# Altium PCB ScoreLED.PcbDoc (part 3 of 4)
Units mil, origin at the board's own origin, x right, y up, seen from the top; angles counter-clockwise.
Board outline 15000 x 7000 mil, 4 copper layers (Top Layer, Ground, Power, Bottom Layer); 605 components, 525 nets, 1780 pads, 554 vias.
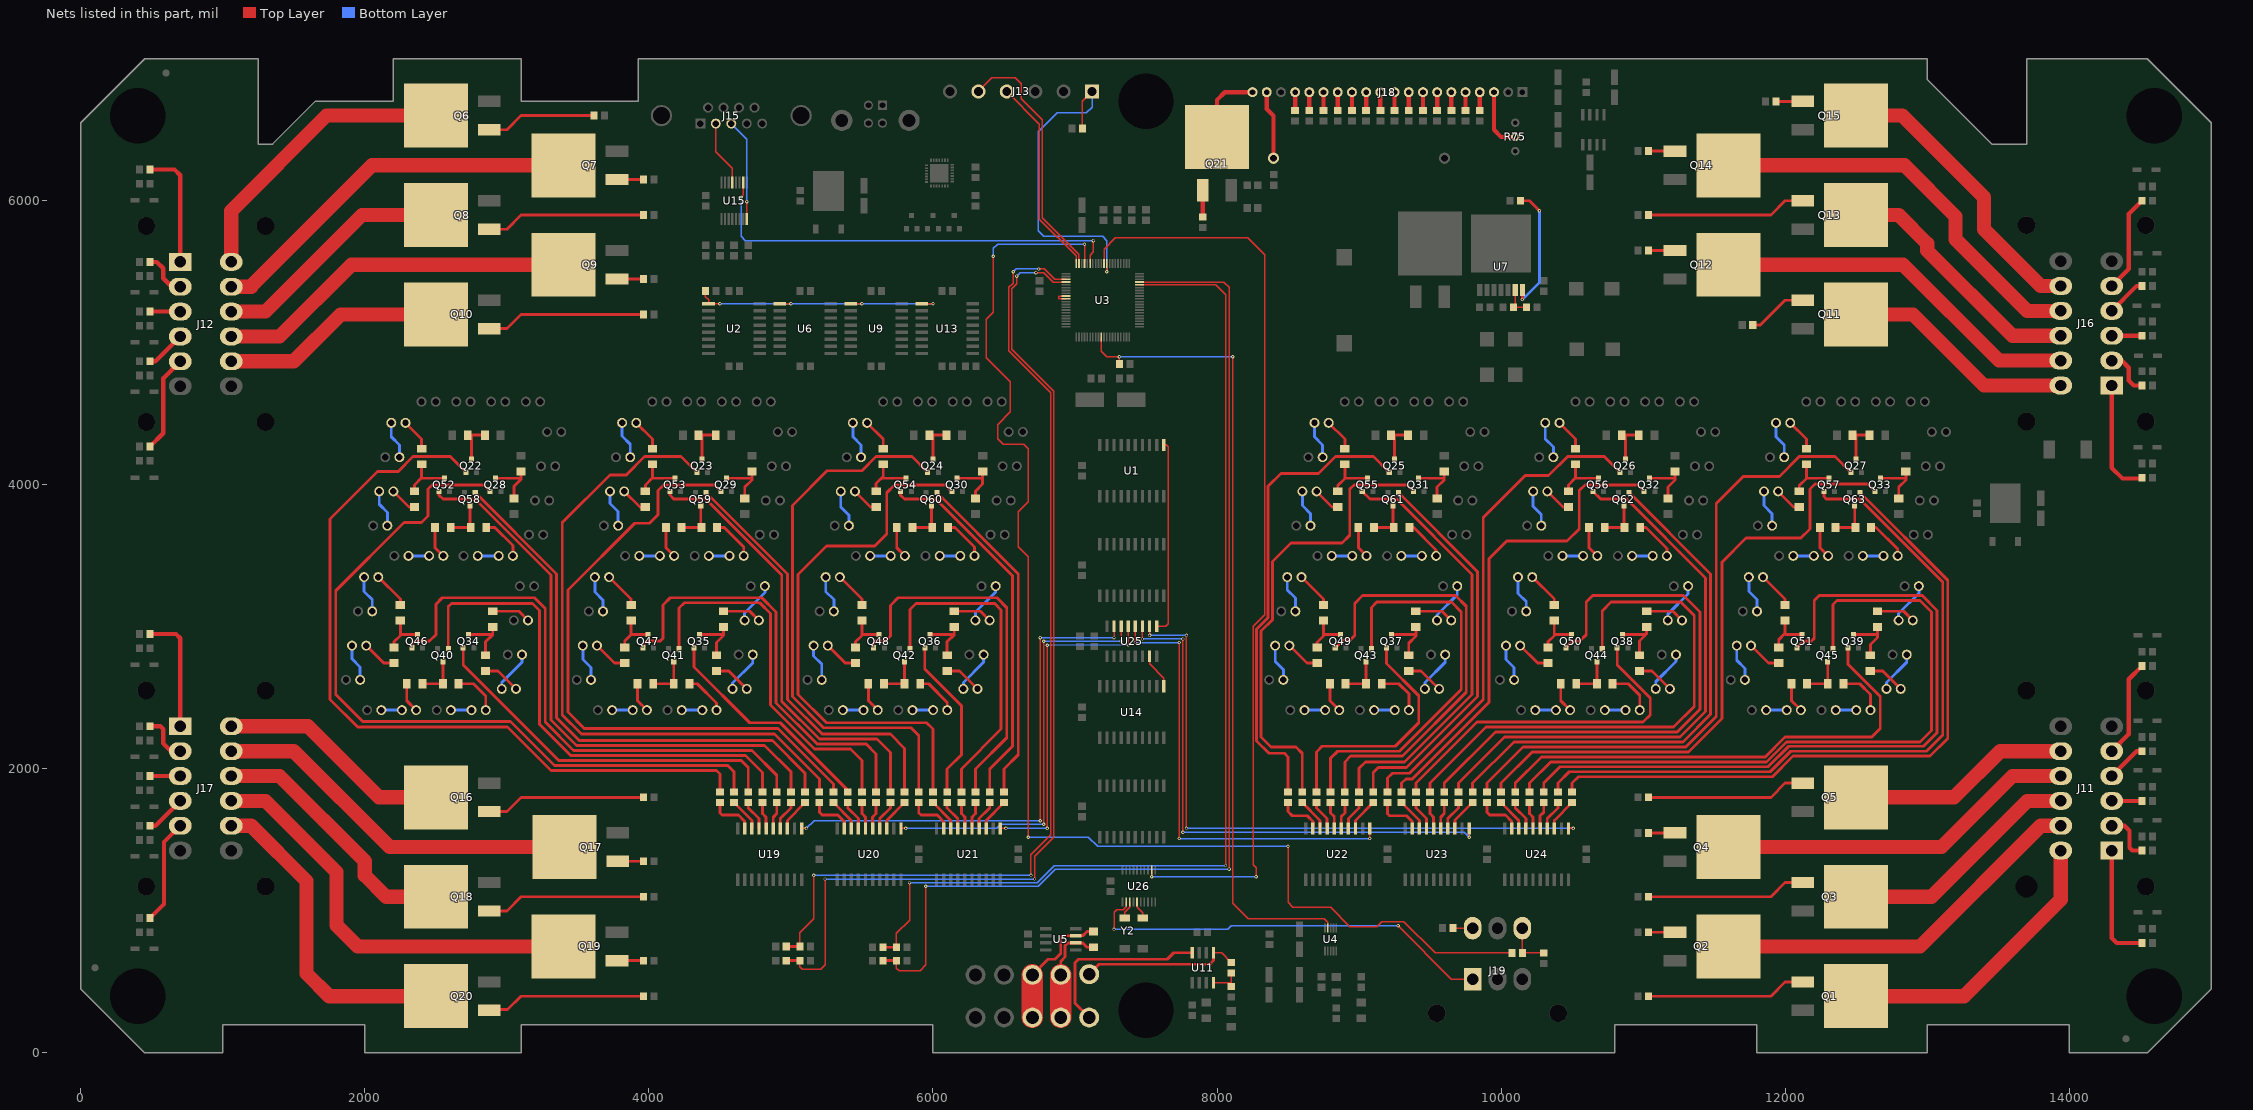
[diagram p5: the nets of this part, all layers, seen from the top]

## Via types
v1: diameter 24, hole 12, Top Layer to Bottom Layer, 468 vias
v2: diameter 50, hole 28, Top Layer to Bottom Layer, 86 vias

## Nets (pads, with @x,y where several pads share a name; then routed paths per layer and width w, separated by ;. In a path a pad name is that pad's centre, name@x,y a point inside that pad or via, vN(x,y) a via of type N, cw(c..) or ccw(c..) an arc to the next point about the centre after c; other vN are vias at no path point) (continued)
NetDS50_2: DS50.2 R147.2 | length 275.6
  Top Layer w20: R147.2@2900,3110 3084.9,3110 DS50.2@3149,3045.9
NetDS51_2: DS51.2 DS52.1 | length 300.3
  Bottom Layer w20: DS52.1@4674,3045.9 4674,3099 4816.6,3241.6 DS51.2@4816.6,3287.1
NetDS52_2: DS52.2 R148.2 | length 275.6
  Top Layer w20: R148.2@4525,3110 4709.9,3110 DS52.2@4774,3045.9
NetDS53_2: DS53.2 DS54.1 | length 300.3
  Bottom Layer w20: DS54.1@6299,3045.9 6299,3104 6441.6,3246.6 DS53.2@6441.6,3287.1
NetDS54_2: DS54.2 R149.2 | length 275.6
  Top Layer w20: R149.2@6150,3110 6334.9,3110 DS54.2@6399,3045.9
NetDS55_2: DS55.2 DS56.1 | length 300.3
  Bottom Layer w20: DS56.1@9549,3045.9 9549,3084 9691.6,3226.6 DS55.2@9691.6,3287.1
NetDS56_2: DS56.2 R150.2 | length 275.6
  Top Layer w20: R150.2@9400,3110 9584.9,3110 DS56.2@9649,3045.9
NetDS57_2: DS57.2 DS58.1 | length 300.3
  Bottom Layer w20: DS58.1@11174,3045.9 11174,3089 11316.6,3231.6 DS57.2@11316.6,3287.1
NetDS58_2: DS58.2 R151.2 | length 275.6
  Top Layer w20: R151.2@11025,3110 11209.9,3110 DS58.2@11274,3045.9
NetDS59_2: DS59.2 DS60.1 | length 300.3
  Bottom Layer w20: DS60.1@12799,3045.9 12799,3094 12941.6,3236.6 DS59.2@12941.6,3287.1
NetDS60_2: DS60.2 R152.2 | length 275.6
  Top Layer w20: R152.2@12650,3110 12834.9,3110 DS60.2@12899,3045.9
NetDS61_2: DS61.2 DS62.1 | length 300.4
  Bottom Layer w20: DS62.1@2963.9,2563.3 2963.9,2608.9 3106.5,2751.5 DS61.2@3106.5,2804.6
NetDS62_2: DS62.2 R153.2 | length 266.4
  Top Layer w20: R153.2@2850,2690 2937.2,2690 DS62.2@3063.9,2563.3
NetDS63_2: DS63.2 DS64.1 | length 300.4
  Bottom Layer w20: DS64.1@4588.9,2563.3 4588.9,2603.9 4731.5,2746.5 DS63.2@4731.5,2804.6
NetDS64_2: DS64.2 R154.2 | length 266.4
  Top Layer w20: R154.2@4475,2690 4562.2,2690 DS64.2@4688.9,2563.3
NetDS65_2: DS65.2 DS66.1 | length 300.4
  Bottom Layer w20: DS66.1@6213.9,2563.3 6213.9,2608.9 6356.5,2751.5 DS65.2@6356.5,2804.6
NetDS66_2: DS66.2 R155.2 | length 266.4
  Top Layer w20: R155.2@6100,2690 6187.2,2690 DS66.2@6313.9,2563.3
NetDS67_2: DS67.2 DS68.1 | length 300.4
  Bottom Layer w20: DS68.1@9463.9,2563.3 9463.9,2608.9 9606.5,2751.5 DS67.2@9606.5,2804.6
NetDS68_2: DS68.2 R156.2 | length 266.4
  Top Layer w20: R156.2@9350,2690 9437.2,2690 DS68.2@9563.9,2563.3
NetDS69_2: DS69.2 DS70.1 | length 300.4
  Bottom Layer w20: DS70.1@11088.9,2563.3 11088.9,2613.9 11231.5,2756.5 DS69.2@11231.5,2804.6
NetDS70_2: DS70.2 R157.2 | length 266.4
  Top Layer w20: R157.2@10975,2690 11062.2,2690 DS70.2@11188.9,2563.3
NetDS71_2: DS71.2 DS72.1 | length 300.4
  Bottom Layer w20: DS72.1@12713.9,2563.3 12713.9,2608.9 12856.5,2751.5 DS71.2@12856.5,2804.6
NetDS72_2: DS72.2 R158.2 | length 266.4
  Top Layer w20: R158.2@12600,2690 12687.2,2690 DS72.2@12813.9,2563.3
NetDS73_2: DS73.2 DS74.1 | length 145
  Bottom Layer w20: DS73.2@2606.1,2414.2 DS74.1@2751.1,2414.2
NetDS74_2: DS74.2 R165.2 | length 326.5
  Top Layer w20: R165.2@2660,2600 2765,2600 2851.1,2513.9 DS74.2@2851.1,2414.2
NetDS75_2: DS75.2 DS76.1 | length 145
  Bottom Layer w20: DS75.2@4231.1,2414.2 DS76.1@4376.1,2414.2
NetDS76_2: DS76.2 R166.2 | length 297.2
  Top Layer w20: R166.2@4285,2600 4340,2600 4476.1,2463.9 DS76.2@4476.1,2414.2
NetDS77_2: DS77.2 DS78.1 | length 145
  Bottom Layer w20: DS77.2@5856.1,2414.2 DS78.1@6001.1,2414.2
NetDS78_2: DS78.2 R167.2 | length 300.1
  Top Layer w20: R167.2@5910,2600 5970,2600 6101.1,2468.9 DS78.2@6101.1,2414.2
NetDS79_2: DS79.2 DS80.1 | length 145
  Bottom Layer w20: DS79.2@9106.1,2414.2 DS80.1@9251.1,2414.2
NetDS80_2: DS80.2 R168.2 | length 335.3
  Top Layer w20: R168.2@9160,2600 9280,2600 9351.1,2528.9 DS80.2@9351.1,2414.2
NetDS81_2: DS81.2 DS82.1 | length 145
  Bottom Layer w20: DS81.2@10731.1,2414.2 DS82.1@10876.1,2414.2
NetDS82_2: DS82.2 R169.2 | length 329.4
  Top Layer w20: R169.2@10785,2600 10895,2600 10976.1,2518.9 DS82.2@10976.1,2414.2
NetDS83_2: DS83.2 DS84.1 | length 145
  Bottom Layer w20: DS83.2@12356.1,2414.2 DS84.1@12501.1,2414.2
NetDS84_2: DS84.2 R170.2 | length 332.3
  Top Layer w20: R170.2@12410,2600 12525,2600 12601.1,2523.9 DS84.2@12601.1,2414.2
NetDS85_2: DS85.2 DS86.1 | length 145
  Bottom Layer w20: DS85.2@2116.1,2414.2 DS86.1@2261.1,2414.2
NetDS86_2: DS86.2 R171.2 | length 213.2
  Top Layer w20: R171.2@2295,2600 2295,2480.3 DS86.2@2361.1,2414.2
NetDS87_2: DS87.2 DS88.1 | length 145
  Bottom Layer w20: DS87.2@3741.1,2414.2 DS88.1@3886.1,2414.2
NetDS88_2: DS88.2 R172.2 | length 213.2
  Top Layer w20: R172.2@3920,2600 3920,2480.3 DS88.2@3986.1,2414.2
NetDS89_2: DS89.2 DS90.1 | length 145
  Bottom Layer w20: DS89.2@5366.1,2414.2 DS90.1@5511.1,2414.2
NetDS90_2: DS90.2 R173.2 | length 213.2
  Top Layer w20: R173.2@5545,2600 5545,2480.3 DS90.2@5611.1,2414.2
NetDS91_2: DS91.2 DS92.1 | length 145
  Bottom Layer w20: DS91.2@8616.1,2414.2 DS92.1@8761.1,2414.2
NetDS92_2: DS92.2 R174.2 | length 213.2
  Top Layer w20: R174.2@8795,2600 8795,2480.3 DS92.2@8861.1,2414.2
NetDS93_2: DS93.2 DS94.1 | length 145
  Bottom Layer w20: DS93.2@10241.1,2414.2 DS94.1@10386.1,2414.2
NetDS94_2: DS94.2 R175.2 | length 213.2
  Top Layer w20: R175.2@10420,2600 10420,2480.3 DS94.2@10486.1,2414.2
NetDS95_2: DS95.2 DS96.1 | length 145
  Bottom Layer w20: DS95.2@11866.1,2414.2 DS96.1@12011.1,2414.2
NetDS96_2: DS96.2 R176.2 | length 213.2
  Top Layer w20: R176.2@12045,2600 12045,2480.3 DS96.2@12111.1,2414.2
NetDS97_2: DS97.2 DS98.1 | length 265.1
  Bottom Layer w20: DS98.1@1909.5,2868.4 1909.5,2775.5 1967,2718 DS97.2@1967,2627.1
NetDS98_2: DS98.2 R183.2 | length 246.6
  Top Layer w20: DS98.2@2009.5,2868.4 2132.9,2745 R183.2@2205,2745
NetDS99_2: DS99.2 DS100.1 | length 266.5
  Bottom Layer w20: DS100.1@3535,2870 3535,2770 3592,2713 DS99.2@3592,2627.1
NetDS100_2: DS100.2 R184.2 | length 246.6
  Top Layer w20: DS100.2@3634.5,2868.4 3757.9,2745 R184.2@3830,2745
NetDS101_2: DS101.2 DS102.1 | length 265.1
  Bottom Layer w20: DS102.1@5159.5,2868.4 5159.5,2795.5 5217,2738 DS101.2@5217,2627.1
NetDS102_2: DS102.2 R185.2 | length 246.6
  Top Layer w20: DS102.2@5259.5,2868.4 5382.9,2745 R185.2@5455,2745
NetDS103_2: DS103.2 DS104.1 | length 265.1
  Bottom Layer w20: DS104.1@8409.5,2868.4 8409.5,2755.5 8467,2698 DS103.2@8467,2627.1
NetDS104_2: DS104.2 R186.2 | length 246.6
  Top Layer w20: DS104.2@8509.5,2868.4 8632.9,2745 R186.2@8705,2745
NetDS105_2: DS105.2 DS106.1 | length 265.1
  Bottom Layer w20: DS106.1@10034.5,2868.4 10034.5,2770.5 10092,2713 DS105.2@10092,2627.1
NetDS106_2: DS106.2 R187.2 | length 246.6
  Top Layer w20: DS106.2@10134.5,2868.4 10257.9,2745 R187.2@10330,2745
NetDS107_2: DS107.2 DS108.1 | length 265.1
  Bottom Layer w20: DS108.1@11659.5,2868.4 11659.5,2765.5 11717,2708 DS107.2@11717,2627.1
NetDS108_2: DS108.2 R188.2 | length 246.6
  Top Layer w20: DS108.2@11759.5,2868.4 11882.9,2745 R188.2@11955,2745
NetDS109_2: DS109.2 DS110.1 | length 265
  Bottom Layer w20: DS110.1@1994.6,3350.9 1994.6,3250.4 2052.1,3192.9 DS109.2@2052.1,3109.7
NetDS110_2: DS110.2 R189.2 | length 260.3
  Top Layer w20: DS110.2@2094.6,3350.9 2250,3195.5 R189.2@2250,3155
NetDS111_2: DS111.2 DS112.1 | length 265
  Bottom Layer w20: DS112.1@3619.6,3350.9 3619.6,3245.4 3677.1,3187.9 DS111.2@3677.1,3109.7
NetDS112_2: DS112.2 R190.2 | length 260.3
  Top Layer w20: DS112.2@3719.6,3350.9 3875,3195.5 R190.2@3875,3155
NetDS113_2: DS113.2 DS114.1 | length 265
  Bottom Layer w20: DS114.1@5244.6,3350.9 5244.6,3250.4 5302.1,3192.9 DS113.2@5302.1,3109.7
NetDS114_2: DS114.2 R191.2 | length 260.3
  Top Layer w20: DS114.2@5344.6,3350.9 5500,3195.5 R191.2@5500,3155
NetDS115_2: DS115.2 DS116.1 | length 265
  Bottom Layer w20: DS116.1@8494.6,3350.9 8494.6,3260.4 8552.1,3202.9 DS115.2@8552.1,3109.7
NetDS116_2: DS116.2 R192.2 | length 260.3
  Top Layer w20: DS116.2@8594.6,3350.9 8750,3195.5 R192.2@8750,3155
NetDS117_2: DS117.2 DS118.1 | length 265
  Bottom Layer w20: DS118.1@10119.6,3350.9 10119.6,3235.4 10177.1,3177.9 DS117.2@10177.1,3109.7
NetDS118_2: DS118.2 R193.2 | length 260.3
  Top Layer w20: DS118.2@10219.6,3350.9 10375,3195.5 R193.2@10375,3155
NetDS119_2: DS119.2 DS120.1 | length 265
  Bottom Layer w20: DS120.1@11744.6,3350.9 11744.6,3250.4 11802.1,3192.9 DS119.2@11802.1,3109.7
NetDS120_2: DS120.2 R194.2 | length 260.3
  Top Layer w20: DS120.2@11844.6,3350.9 12000,3195.5 R194.2@12000,3155
NetDS121_2: DS121.2 DS122.1 | length 265
  Bottom Layer w20: DS122.1@2101,3954.1 2101,3864 2158.4,3806.6 DS121.2@2158.4,3712.9
NetDS122_2: DS122.2 R201.2 | length 194.2
  Top Layer w20: DS122.2@2201,3954.1 2310.1,3845 R201.2@2350,3845
NetDS123_2: DS123.2 DS124.1 | length 265
  Bottom Layer w20: DS124.1@3726,3954.1 3726,3869 3783.4,3811.6 DS123.2@3783.4,3712.9
NetDS124_2: DS124.2 R202.2 | length 201.3
  Top Layer w20: DS124.2@3826,3954.1 3940.1,3840 R202.2@3980,3840
NetDS125_2: DS125.2 DS126.1 | length 265
  Bottom Layer w20: DS126.1@5351,3954.1 5351,3844 5408.4,3786.6 DS125.2@5408.4,3712.9
NetDS126_2: DS126.2 R203.2 | length 194.2
  Top Layer w20: DS126.2@5451,3954.1 5560.1,3845 R203.2@5600,3845
NetDS127_2: DS127.2 DS128.1 | length 265
  Bottom Layer w20: DS128.1@8601,3954.1 8601,3854 8658.4,3796.6 DS127.2@8658.4,3712.9
NetDS128_2: DS128.2 R204.2 | length 194.2
  Top Layer w20: DS128.2@8701,3954.1 8810.1,3845 R204.2@8850,3845
NetDS129_2: DS129.2 DS130.1 | length 265
  Bottom Layer w20: DS130.1@10226,3954.1 10226,3849 10283.4,3791.6 DS129.2@10283.4,3712.9
NetDS130_2: DS130.2 R205.2 | length 194.2
  Top Layer w20: DS130.2@10326,3954.1 10435.1,3845 R205.2@10475,3845
NetDS131_2: DS131.2 DS132.1 | length 265
  Bottom Layer w20: DS132.1@11851,3954.1 11851,3854 11908.4,3796.6 DS131.2@11908.4,3712.9
NetDS132_2: DS132.2 R206.2 | length 194.2
  Top Layer w20: DS132.2@11951,3954.1 12060.1,3845 R206.2@12100,3845
NetDS133_2: DS133.2 DS134.1 | length 265.5
  Bottom Layer w20: DS134.1@2186.1,4436.7 2186.1,4338.9 2243.5,4281.5 DS133.2@2243.5,4195
NetDS134_2: DS134.2 R207.2 | length 228.9
  Top Layer w20: DS134.2@2286.1,4436.7 2400,4322.8 R207.2@2400,4255
NetDS135_2: DS135.2 DS136.1 | length 265.5
  Bottom Layer w20: DS136.1@3811.1,4436.7 3811.1,4343.9 3868.5,4286.5 DS135.2@3868.5,4195
NetDS136_2: DS136.2 R208.2 | length 228.9
  Top Layer w20: DS136.2@3911.1,4436.7 4025,4322.8 R208.2@4025,4255
NetDS137_2: DS137.2 DS138.1 | length 265.5
  Bottom Layer w20: DS138.1@5436.1,4436.7 5436.1,4338.9 5493.5,4281.5 DS137.2@5493.5,4195
NetDS138_2: DS138.2 R209.2 | length 228.9
  Top Layer w20: DS138.2@5536.1,4436.7 5650,4322.8 R209.2@5650,4255
NetDS139_2: DS139.2 DS140.1 | length 265.5
  Bottom Layer w20: DS140.1@8686.1,4436.7 8686.1,4338.9 8743.5,4281.5 DS139.2@8743.5,4195
NetDS140_2: DS140.2 R210.2 | length 228.9
  Top Layer w20: DS140.2@8786.1,4436.7 8900,4322.8 R210.2@8900,4255
NetDS141_2: DS141.2 DS142.1 | length 265.5
  Bottom Layer w20: DS142.1@10311.1,4436.7 10311.1,4323.9 10368.5,4266.5 DS141.2@10368.5,4195
NetDS142_2: DS142.2 R211.2 | length 228.9
  Top Layer w20: DS142.2@10411.1,4436.7 10525,4322.8 R211.2@10525,4255
NetDS143_2: DS143.2 DS144.1 | length 265.5
  Bottom Layer w20: DS144.1@11936.1,4436.7 11936.1,4338.9 11993.5,4281.5 DS143.2@11993.5,4195
NetDS144_2: DS144.2 R212.2 | length 228.9
  Top Layer w20: DS144.2@12036.1,4436.7 12150,4322.8 R212.2@12150,4255
NetDS145_2: DS145.2 DS146.1 | length 145
  Bottom Layer w20: DS145.2@2307.5,3500 DS146.1@2452.5,3500
NetDS146_2: DS146.2 R219.2 | length 223.8
  Top Layer w20: R219.2@2495,3700 2495,3557.5 DS146.2@2552.5,3500
NetDS147_2: DS147.2 DS148.1 | length 145
  Bottom Layer w20: DS147.2@3932.5,3500 DS148.1@4077.5,3500
NetDS148_2: DS148.2 R220.2 | length 223.8
  Top Layer w20: R220.2@4120,3700 4120,3557.5 DS148.2@4177.5,3500
NetDS149_2: DS149.2 DS150.1 | length 145
  Bottom Layer w20: DS149.2@5557.5,3500 DS150.1@5702.5,3500
NetDS150_2: DS150.2 R221.2 | length 223.8
  Top Layer w20: R221.2@5745,3700 5745,3557.5 DS150.2@5802.5,3500
NetDS151_2: DS151.2 DS152.1 | length 145
  Bottom Layer w20: DS151.2@8807.5,3500 DS152.1@8952.5,3500
NetDS152_2: DS152.2 R222.2 | length 223.8
  Top Layer w20: R222.2@8995,3700 8995,3557.5 DS152.2@9052.5,3500
NetDS153_2: DS153.2 DS154.1 | length 145
  Bottom Layer w20: DS153.2@10432.5,3500 DS154.1@10577.5,3500
NetDS154_2: DS154.2 R223.2 | length 223.8
  Top Layer w20: R223.2@10620,3700 10620,3557.5 DS154.2@10677.5,3500
NetDS155_2: DS155.2 DS156.1 | length 145
  Bottom Layer w20: DS155.2@12057.5,3500 DS156.1@12202.5,3500
NetDS156_2: DS156.2 R224.2 | length 223.8
  Top Layer w20: R224.2@12245,3700 12245,3557.5 DS156.2@12302.5,3500
NetDS157_2: DS157.2 DS158.1 | length 147.5
  Bottom Layer w20: DS157.2@2795,3500 DS158.1@2942.5,3500
NetDS158_2: DS158.2 R225.2 | length 312.8
  Top Layer w20: R225.2@2855,3700 2915,3700 3042.5,3572.5 DS158.2@3042.5,3500
NetDS159_2: DS159.2 DS160.1 | length 145
  Bottom Layer w20: DS159.2@4422.5,3500 DS160.1@4567.5,3500
NetDS160_2: DS160.2 R226.2 | length 307
  Top Layer w20: R226.2@4480,3700 4530,3700 4667.5,3562.5 DS160.2@4667.5,3500
NetDS161_2: DS161.2 DS162.1 | length 145
  Bottom Layer w20: DS161.2@6047.5,3500 DS162.1@6192.5,3500
NetDS162_2: DS162.2 R227.2 | length 307
  Top Layer w20: R227.2@6105,3700 6155,3700 6292.5,3562.5 DS162.2@6292.5,3500
NetDS163_2: DS163.2 DS164.1 | length 145
  Bottom Layer w20: DS163.2@9297.5,3500 DS164.1@9442.5,3500
NetDS164_2: DS164.2 R228.2 | length 295.2
  Top Layer w20: R228.2@9355,3700 9385,3700 9542.5,3542.5 DS164.2@9542.5,3500
NetDS165_2: DS165.2 DS166.1 | length 145
  Bottom Layer w20: DS165.2@10922.5,3500 DS166.1@11067.5,3500
NetDS166_2: DS166.2 R229.2 | length 301.1
  Top Layer w20: R229.2@10980,3700 11020,3700 11167.5,3552.5 DS166.2@11167.5,3500
NetDS167_2: DS167.2 DS168.1 | length 145
  Bottom Layer w20: DS167.2@12547.5,3500 DS168.1@12692.5,3500
NetDS168_2: DS168.2 R230.2 | length 298.2
  Top Layer w20: R230.2@12605,3700 12640,3700 12792.5,3547.5 DS168.2@12792.5,3500
NetJ3_1: J3.1 J7.1 R5.2 U5.7 | length 917.8
  Top Layer w20: J7.1@6700,550 6810,660 6860,660 6900,700 6900,805 6920,825 7055,825 7085,855 R5.2@7130,855
  Top Layer w150: J3.1@6700,250 J7.1@6700,550
NetJ4_1: J4.1 J8.1 R5.1 U5.6 | length 738.1
  Top Layer w20: J8.1@6900,550 6900,645 6930,675 6930,755 6950,775 7055,775 7085,745 R5.1@7130,745
  Top Layer w150: J4.1@6900,250 J8.1@6900,550
NetJ9_1: J9.1 R59.2 U11.5 | length 1123
  Top Layer w10: U11.5@7975,705.32 8031.68,705.32 R59.2@8100,637
  Top Layer w20: J9.1@7100,555 7170,625 7950,625 7975,650 U11.5@7975,705.32
NetJ10_1: J10.1 U11.8 | length 1280.5
  Top Layer w20: J10.1@7100,250 7000,350 7000,635 7025,660 7650,660 7695.32,705.32 U11.8@7825,705.32
NetJ11_1: J11.1 R33.2 | length 842.5
  Top Layer w30: J11.1@14300,1425 14300,810 14335,775 R33.2@14513,775
NetJ11_2: J11.2 R35.2 | length 355.8
  Top Layer w30: J11.2@14300,1600 14390,1600 14425,1565 14425,1445 14445,1425 R35.2@14513,1425
NetJ11_3: J11.3 R37.2 | length 213
  Top Layer w30: J11.3@14300,1775 R37.2@14513,1775
NetJ11_4: J11.4 R39.2 | length 285.5
  Top Layer w30: J11.4@14300,1950 14475,2125 R39.2@14513,2125
NetJ11_5: J11.5 R41.2 | length 688.2
  Top Layer w30: J11.5@14300,2125 14420,2245 14420,2632 R41.2@14513,2725
NetJ11_8: J11.8 Q5.2 | length 1575.6
  Top Layer w100: Q5.2@12500,1800 13190,1800 13515,2125 J11.8@13941,2125
NetJ11_9: J11.9 Q4.2 | length 2548.1
  Top Layer w100: Q4.2@11600,1450 13100,1450 13600,1950 J11.9@13941,1950
NetJ11_10: J11.10 Q3.2 | length 1720.6
  Top Layer w100: Q3.2@12500,1100 13030,1100 13705,1775 J11.10@13941,1775
NetJ11_11: J11.11 Q2.2 | length 2693.1
  Top Layer w100: Q2.2@11600,750 12950,750 13800,1600 J11.11@13941,1600
NetJ11_12: J11.12 Q1.2 | length 2067.1
  Top Layer w100: Q1.2@12500,400 13260,400 13941,1081 J11.12@13941,1425
NetJ12_1: J12.1 R43.2 | length 839.6
  Top Layer w30: R43.2@487,6220 660,6220 700,6180 J12.1@700,5570
NetJ12_2: J12.2 R45.2 | length 326.5
  Top Layer w30: R45.2@487,5570 535,5570 580,5525 580,5455 640,5395 J12.2@700,5395
NetJ12_3: J12.3 R47.2 | length 213
  Top Layer w30: R47.2@487,5220 J12.3@700,5220
NetJ12_4: J12.4 R49.2 | length 285.5
  Top Layer w30: R49.2@487,4870 525,4870 J12.4@700,5045
NetJ12_5: J12.5 R51.2 | length 688.2
  Top Layer w30: R51.2@487,4270 580,4363 580,4750 J12.5@700,4870
NetJ12_8: J12.8 Q10.2 | length 1577.7
  Top Layer w100: J12.8@1059,4870 1500,4870 1830,5200 Q10.2@2500,5200
NetJ12_9: J12.9 Q9.2 | length 2550.2
  Top Layer w100: J12.9@1059,5045 1400,5045 1905,5550 Q9.2@3400,5550
NetJ12_10: J12.10 Q8.2 | length 1731.7
  Top Layer w100: J12.10@1050,5220 1300,5220 1980,5900 Q8.2@2500,5900
NetJ12_11: J12.11 Q7.2 | length 2683.1
  Top Layer w100: J12.11@1059,5395 1200,5395 ; 1200,5400 2050,6250 ; 2060,6250 Q7.2@3400,6250
NetJ12_12: J12.12 Q6.2 | length 2077.9
  Top Layer w100: J12.12@1059,5570 1059,5929 1730,6600 Q6.2@2500,6600
NetJ13_1: J13.1 R3.1 U3.9 | length 2338.1
  Top Layer w10: R3.1@7052,6510 7052,6702 J13.1@7120,6770 ; v1(7224.53,5500.47) U3.9@7224.53,5559.84
  Bottom Layer w10: J13.1@7120,6770 7120,6660 7080,6620 6875,6620 6740,6485 6740,5790 6780,5750 7194.53,5750 7224.53,5720 v1(7224.53,5500.47)
NetJ15_2: J15.2 U15.13 | length 463.2
  Top Layer w10: J15.2@4471,6544 4471,6344 4587.2,6227.8 U15.13@4587.2,6128.94
NetJ15_3: J15.3 U15.8 | length 718.3
  Top Layer w10: U15.8@4689.57,5871.06 v1(4689.57,5994.57)
  Bottom Layer w10: J15.3@4580,6544 4689.57,6434.43 v1(4689.57,5994.57)
NetJ16_1: J16.1 R84.2 | length 826.1
  Top Layer w30: J16.1@14300,4700 14300,4120 14375,4045 14508,4045 R84.2@14513,4050
NetJ16_2: J16.2 R86.2 | length 338.2
  Top Layer w30: J16.2@14300,4875 14370,4875 14420,4825 14420,4735 14455,4700 R86.2@14513,4700
NetJ16_3: J16.3 R88.2 | length 213
  Top Layer w30: J16.3@14300,5050 R88.2@14513,5050
NetJ16_4: J16.4 R90.2 | length 285.5
  Top Layer w30: J16.4@14300,5225 14475,5400 R90.2@14513,5400
NetJ16_5: J16.5 R92.2 | length 688.2
  Top Layer w30: J16.5@14300,5400 14420,5520 14420,5907 R92.2@14513,6000
NetJ16_8: J16.8 Q15.2 | length 2069.9
  Top Layer w100: Q15.2@12500,6600 12825,6600 13400,6025 13400,5800 13800,5400 J16.8@13941,5400
NetJ16_9: J16.9 Q14.2 | length 2849.3
  Top Layer w100: Q14.2@11610,6250 12840,6250 13200,5890 13200,5730 13705,5225 J16.9@13941,5225
NetJ16_10: J16.10 Q13.2 | length 1822.4
  Top Layer w100: Q13.2@12500,5900 12800,5900 13000,5700 13000,5650 13600,5050 J16.10@13941,5050
NetJ16_11: J16.11 Q12.2 | length 2620.6
  Top Layer w100: Q12.2@11600,5550 12830,5550 13505,4875 J16.11@13941,4875
NetJ16_12: J16.12 Q11.2 | length 1648.1
  Top Layer w100: Q11.2@12500,5200 12900,5200 13400,4700 J16.12@13941,4700
NetJ17_1: J17.1 R94.2 | length 845.4
  Top Layer w30: R94.2@487,2950 670,2950 700,2920 J17.1@700,2300
NetJ17_2: J17.2 R96.2 | length 344.1
  Top Layer w30: R96.2@487,2300 560,2300 580,2280 580,2180 635,2125 J17.2@700,2125
NetJ17_3: J17.3 R98.2 | length 213
  Top Layer w30: R98.2@487,1950 J17.3@700,1950
NetJ17_4: J17.4 R100.2 | length 285.5
  Top Layer w30: R100.2@487,1600 525,1600 J17.4@700,1775
NetJ17_5: J17.5 R102.2 | length 738.2
  Top Layer w30: R102.2@487,950 585,1048 585,1485 J17.5@700,1600
NetJ17_8: J17.8 Q20.2 | length 2318.8
  Top Layer w100: J17.8@1059,1600 1200,1600 1590,1210 1590,560 1750,400 Q20.2@2500,400
NetJ17_9: J17.9 Q19.2 | length 2985.2
  Top Layer w100: J17.9@1059,1775 1300,1775 1800,1275 1800,900 1950,750 Q19.2@3400,750
NetJ17_10: J17.10 Q18.2 | length 1651.7
  Top Layer w100: J17.10@1059,1950 1400,1950 2000,1350 2000,1250 2150,1100 Q18.2@2300,1100
NetJ17_11: J17.11 Q17.2 | length 2620.6
  Top Layer w100: J17.11@1059,2125 1500,2125 2175,1450 ; 2180,1450 Q17.2@3405,1450
NetJ17_12: J17.12 Q16.2 | length 1448.1
  Top Layer w100: J17.12@1059,2300 1600,2300 2100,1800 Q16.2@2300,1800
NetJ18_3: J18.3 R75.2 | length 435.7
  Top Layer w30: J18.3@9950,6765 9950,6500 10000,6450 R75.2@10100,6450
NetJ18_4: J18.4 R76.2 | length 128
  Top Layer w30: R76.2@9850,6637 J18.4@9850,6765
NetJ18_5: J18.5 R77.2 | length 128
  Top Layer w30: R77.2@9750,6637 J18.5@9750,6765
NetJ18_6: J18.6 R78.2 | length 128
  Top Layer w30: R78.2@9650,6637 J18.6@9650,6765
NetJ18_7: J18.7 R20.2 | length 128
  Top Layer w30: R20.2@9550,6637 J18.7@9550,6765
NetJ18_8: J18.8 R21.2 | length 128
  Top Layer w30: R21.2@9450,6637 J18.8@9450,6765
NetJ18_9: J18.9 R22.2 | length 128
  Top Layer w30: R22.2@9350,6637 J18.9@9350,6765
NetJ18_10: J18.10 R23.2 | length 128
  Top Layer w30: R23.2@9250,6637 J18.10@9250,6765
NetJ18_11: J18.11 R24.2 | length 128
  Top Layer w30: R24.2@9150,6637 J18.11@9150,6765
NetJ18_12: J18.12 R25.2 | length 128
  Top Layer w30: R25.2@9050,6637 J18.12@9050,6765
NetJ18_13: J18.13 R26.2 | length 128
  Top Layer w30: R26.2@8950,6637 J18.13@8950,6765
NetJ18_14: J18.14 R27.2 | length 128
  Top Layer w30: R27.2@8850,6637 J18.14@8850,6765
NetJ18_15: J18.15 R79.2 | length 128
  Top Layer w30: R79.2@8750,6637 J18.15@8750,6765
NetJ18_16: J18.16 R80.2 | length 128
  Top Layer w30: R80.2@8650,6637 J18.16@8650,6765
NetJ18_17: J18.17 R81.2 | length 128
  Top Layer w30: R81.2@8550,6637 J18.17@8550,6765
NetJ18_19: J18.19 R67.2 | length 484.7
  Top Layer w30: J18.19@8350,6765 8350,6646.85 8397.64,6599.21 R67.2@8397.64,6300
NetJ18_20: J18.20 Q21.2 | length 532.8
  Top Layer w30: Q21.2@8000,6450 8000,6710 8055,6765 J18.20@8250,6765
NetJ19_1: J19.1 U26.2 | length 2945.2
  Top Layer w10: v1(7275,870) 7275,990 7295,1010 7340,1010 7360.43,1030.43 U26.2@7360.43,1062.8 ; v1(9275,895) 9650,520 J19.1@9800,520
  Bottom Layer w10: v1(7275,870) 8075,870 8100,895 v1(9275,895)
NetJ19_4: J19.4 R233.2 R234.2 | length 324
  Top Layer w10: J19.4@10150,879 R233.2@10150,705 R234.2@10300,705
NetJ19_6: J19.6 R232.2 | length 138
  Top Layer w10: R232.2@9662,879 J19.6@9800,879
NetQ1_1: Q1.1 R6.2 | length 1129.4
  Top Layer w20: R6.2@11037,400 11900,400 12000,500 Q1.1@12125,500
NetQ2_1: Q2.1 R7.2 | length 188
  Top Layer w20: R7.2@11037,850 Q2.1@11225,850
NetQ3_1: Q3.1 R8.2 | length 1129.4
  Top Layer w20: R8.2@11037,1100 11900,1100 12000,1200 Q3.1@12125,1200
NetQ4_1: Q4.1 R9.2 | length 188
  Top Layer w20: R9.2@11037,1550 Q4.1@11225,1550
NetQ5_1: Q5.1 R10.2 | length 1129.4
  Top Layer w20: R10.2@11037,1800 11900,1800 12000,1900 Q5.1@12125,1900
NetQ6_1: Q6.1 R11.2 | length 779.4
  Top Layer w20: Q6.1@2875,6500 3000,6500 3100,6600 R11.2@3613,6600
NetQ7_1: Q7.1 R12.2 | length 188
  Top Layer w20: Q7.1@3775,6150 R12.2@3963,6150
NetQ8_1: Q8.1 R13.2 | length 1129.4
  Top Layer w20: Q8.1@2875,5800 3000,5800 3100,5900 R13.2@3963,5900
NetQ9_1: Q9.1 R14.2 | length 188
  Top Layer w20: Q9.1@3775,5450 R14.2@3963,5450
NetQ10_1: Q10.1 R15.2 | length 1129.4
  Top Layer w20: Q10.1@2875,5100 3000,5100 3100,5200 R15.2@3963,5200
NetQ11_1: Q11.1 R62.2 | length 422.5
  Top Layer w20: R62.2@11775,5125 11825,5125 12000,5300 Q11.1@12125,5300
NetQ12_1: Q12.1 R63.2 | length 188
  Top Layer w20: R63.2@11037,5650 Q12.1@11225,5650
NetQ13_1: Q13.1 R64.2 | length 1129.4
  Top Layer w20: R64.2@11037,5900 11900,5900 12000,6000 Q13.1@12125,6000
NetQ14_1: Q14.1 R65.2 | length 188
  Top Layer w20: R65.2@11037,6350 Q14.1@11225,6350
NetQ15_1: Q15.1 R66.2 | length 188
  Top Layer w20: R66.2@11937,6700 Q15.1@12125,6700
NetQ16_1: Q16.1 R69.2 | length 1129.4
  Top Layer w20: Q16.1@2875,1700 3000,1700 3100,1800 R69.2@3963,1800
NetQ17_1: Q17.1 R70.2 | length 183
  Top Layer w20: Q17.1@3780,1350 R70.2@3963,1350
NetQ18_1: Q18.1 R71.2 | length 1129.4
  Top Layer w20: Q18.1@2875,1000 3000,1000 3100,1100 R71.2@3963,1100
NetQ19_1: Q19.1 R72.2 | length 188
  Top Layer w20: Q19.1@3775,650 R72.2@3963,650
NetQ20_1: Q20.1 R73.2 | length 1127.4
  Top Layer w20: Q20.1@2875,305 3005,305 3100,400 R73.2@3963,400
NetQ21_1: Q21.1 R83.2 | length 188
  Top Layer w30: R83.2@7900,5887 Q21.1@7900,6075
NetQ22_1: Q22.1 R105.2 | length 5546.4
  Top Layer w20: Q22.1@2712.6,4088.74 2601.34,4200 2340,4200 2235,4095 2090,4095 1755,3760 1755,2490 1950,2295 3005,2295 3310,1990 4475,1990 4500,1965 R105.2@4500,1837
NetQ22_3: Q22.3 R111.1 R117.1 | length 283.7
  Top Layer w20: R111.1@2725,4350 R117.1@2845,4350 ; Q22.3@2750,4181.26 R111.1@2750,4345
NetQ23_1: Q23.1 R106.2 | length 4630.7
  Top Layer w20: Q23.1@4337.6,4088.74 4226.34,4200 3970,4200 3840,4070 3725,4070 3390,3735 3390,2380 3525,2245 4885,2245 5200,1930 R106.2@5200,1837
NetQ23_3: Q23.3 R112.1 R118.1 | length 288.7
  Top Layer w20: R112.1@4350,4350 R118.1@4470,4350 ; Q23.3@4375,4181.26 R112.1@4375,4350
NetQ24_1: Q24.1 R107.2 | length 3888.5
  Top Layer w20: R107.2@5900,1837 5900,2235 5845,2290 5230,2290 5010,2510 5010,3855 5255,4100 5500,4100 5600,4200 5851.34,4200 Q24.1@5962.6,4088.74
NetQ24_3: Q24.3 R113.1 R119.1 | length 288.7
  Top Layer w20: R113.1@5975,4350 R119.1@6095,4350 ; Q24.3@6000,4181.26 R113.1@6000,4350
NetQ25_1: Q25.1 R108.2 | length 3329
  Top Layer w20: R108.2@8500,1837 8500,2085 8475,2110 8365,2110 8278,2197 8278,2983 8360,3065 8360,3990 8450,4080 8715,4080 8835,4200 9101.34,4200 Q25.1@9212.6,4088.74
NetQ25_3: Q25.3 R114.1 R120.1 | length 278.7
  Top Layer w20: R114.1@9225,4350 R120.1@9345,4350 ; Q25.3@9250,4181.26 R114.1@9250,4340
NetQ26_1: Q26.1 R109.2 | length 3469.7
  Top Layer w20: R109.2@9200,1837 9200,1935 9235,1970 9355,1970 9875,2490 9875,3770 10170,4065 10335,4065 10470,4200 10726.34,4200 Q26.1@10837.6,4088.74
NetQ26_3: Q26.3 R115.1 R121.1 | length 283.7
  Top Layer w20: R115.1@10850,4350 R121.1@10970,4350 ; Q26.3@10875,4181.26 R115.1@10875,4345
NetQ27_1: Q27.1 R110.2 | length 4503.1
  Top Layer w20: R110.2@9900,1837 9900,1900 10155,2155 11300,2155 11515,2370 11515,3870 11705,4060 11960,4060 12100,4200 12351.34,4200 Q27.1@12462.6,4088.74
NetQ27_3: Q27.3 R116.1 R122.1 | length 283.7
  Top Layer w20: R116.1@12475,4350 R122.1@12595,4350 ; Q27.3@12500,4181.26 R116.1@12500,4345
NetQ28_1: Q28.1 R123.2 | length 5430.4
  Top Layer w20: Q28.1@2882.6,3953.74 2836.34,4000 2475,4000 2445,3970 2445,3780 2400,3735 2275,3735 1795,3255 1795,2525 1985,2335 3025,2335 3335,2025 4555,2025 4600,1980 R123.2@4600,1837
NetQ28_3: Q28.3 R129.1 R135.1 | length 389.5
  Top Layer w20: Q28.3@2920,4046.26 3098.74,4046.26 ; R135.1@3050,3905 3050,3990 3100,4040 R129.1@3100,4095
NetQ29_1: Q29.1 R124.2 | length 4500
  Top Layer w20: Q29.1@4507.6,3953.74 4461.34,4000 4105,4000 4065,3960 4065,3790 4005,3730 3900,3730 3430,3260 3430,2400 3545,2285 4910,2285 5300,1895 R124.2@5300,1837
NetQ29_3: Q29.3 R130.1 R136.1 | length 387
  Top Layer w20: Q29.3@4545,4046.26 4721.26,4046.26 ; R136.1@4675,3905 4675,3985 4725,4035 R130.1@4725,4095
NetQ30_1: Q30.1 R125.2 | length 3872.1
  Top Layer w20: R125.2@6000,1837 6000,2280 5955,2325 5250,2325 5050,2525 5050,3370 5250,3570 5590,3570 5675,3655 5675,3945 5730,4000 6086.34,4000 Q30.1@6132.6,3953.74
NetQ30_3: Q30.3 R131.1 R137.1 | length 387
  Top Layer w20: Q30.3@6170,4046.26 6346.26,4046.26 ; R137.1@6300,3905 6300,3955 6350,4005 R131.1@6350,4095
NetQ31_1: Q31.1 R126.2 | length 3304.6
  Top Layer w20: R126.2@8600,1837 8600,2110 8555,2155 8380,2155 8310,2225 8310,2970 8390,3050 8390,3460 8520,3590 8880,3590 8935,3645 8935,3970 8965,4000 9336.34,4000 Q31.1@9382.6,3953.74
NetQ31_3: Q31.3 R132.1 R138.1 | length 389.5
  Top Layer w20: Q31.3@9420,4046.26 9598.74,4046.26 ; R138.1@9550,3905 9550,3985 9600,4035 R132.1@9600,4095
NetQ32_1: Q32.1 R127.2 | length 3409.4
  Top Layer w20: R127.2@9300,1837 9300,1900 9330,1930 9375,1930 9915,2470 9915,3480 10040,3605 10465,3605 10550,3690 10550,3960 10590,4000 10961.34,4000 Q32.1@11007.6,3953.74
NetQ32_3: Q32.3 R133.1 R139.1 | length 389.5
  Top Layer w20: Q32.3@11045,4046.26 11223.74,4046.26 ; R139.1@11175,3905 11175,3985 11225,4035 R133.1@11225,4095
NetQ33_1: Q33.1 R128.2 | length 4397.1
  Top Layer w20: R128.2@10000,1837 10000,1900 10220,2120 11320,2120 11555,2355 11555,3455 11725,3625 12110,3625 12175,3690 12175,3970 12210,4005 12581.34,4005 Q33.1@12632.6,3953.74
NetQ33_3: Q33.3 R134.1 R140.1 | length 389.5
  Top Layer w20: Q33.3@12670,4046.26 12848.74,4046.26 ; R140.1@12800,3905 12800,3985 12850,4035 R134.1@12850,4095
NetQ34_1: Q34.1 R141.2 | length 2601
  Top Layer w20: Q34.1@2692.6,2853.74 2692.6,2732.4 3365,2060 4650,2060 4700,2010 R141.2@4700,1837
NetQ34_3: Q34.3 R147.1 R153.1 | length 382
  Top Layer w20: Q34.3@2730,2946.26 2891.26,2946.26 ; R153.1@2850,2800 2850,2895 2900,2945 R147.1@2900,3000
NetQ35_1: Q35.1 R142.2 | length 1591
  Top Layer w20: Q35.1@4317.6,2853.74 4317.6,2717.4 4710,2325 4925,2325 5400,1850 R142.2@5400,1837
NetQ35_3: Q35.3 R148.1 R154.1 | length 384.5
  Top Layer w20: Q35.3@4355,2946.26 4518.74,2946.26 ; R154.1@4475,2800 4475,2890 4525,2940 R148.1@4525,3000
NetQ36_1: Q36.1 R143.2 | length 1164.8
  Top Layer w20: Q36.1@5942.6,2853.74 5942.6,2702.4 6200,2445 6200,2100 6100,2000 R143.2@6100,1837
NetQ36_3: Q36.3 R149.1 R155.1 | length 379.5
  Top Layer w20: Q36.3@5980,2946.26 6148.74,2946.26 ; R155.1@6100,2805 6100,2895 6150,2945 R149.1@6150,2995
NetQ37_1: Q37.1 R144.2 | length 1710.8
  Top Layer w20: R144.2@8700,1837 8700,2120 8740,2160 9255,2160 9420,2325 9420,2515 9192.6,2742.4 Q37.1@9192.6,2853.74
NetQ37_3: Q37.3 R150.1 R156.1 | length 387
  Top Layer w20: Q37.3@9230,2946.26 9396.26,2946.26 ; R156.1@9350,2800 9350,2885 9400,2935 R150.1@9400,3000
NetQ38_1: Q38.1 R145.2 | length 2481.8
  Top Layer w20: R145.2@9400,1837 9400,1900 9830,2330 11000,2330 11050,2380 11050,2500 10817.6,2732.4 Q38.1@10817.6,2853.74
NetQ38_3: Q38.3 R151.1 R157.1 | length 387
  Top Layer w20: Q38.3@10855,2946.26 11021.26,2946.26 ; R157.1@10975,2800 10975,2900 11025,2950 R151.1@11025,3000
NetQ39_1: Q39.1 R146.2 | length 3455.4
  Top Layer w20: R146.2@10100,1837 10100,1900 10285,2085 11860,2085 12000,2225 12610,2225 12670,2285 12670,2510 12442.6,2737.4 Q39.1@12442.6,2853.74
NetQ39_3: Q39.3 R152.1 R158.1 | length 387
  Top Layer w20: Q39.3@12480,2946.26 12646.26,2946.26 ; R158.1@12600,2800 12600,2875 12650,2925 R152.1@12650,3000
NetQ40_1: Q40.1 R159.2 | length 3617.8
  Top Layer w20: Q40.1@2587.4,2846.26 2587.4,3142.6 2609.8,3165 3180,3165 3230,3115 3230,2315 3450,2095 4680,2095 4800,1975 R159.2@4800,1837
NetQ40_3: Q40.3 R165.1 R171.1 | length 298.7
  Top Layer w20: R171.1@2405,2600 R165.1@2550,2600 Q40.3@2550,2753.74
NetQ41_1: Q41.1 R160.2 | length 2650
  Top Layer w20: Q41.1@4212.4,2846.26 4212.4,3132.6 4249.8,3170 4780,3170 4855,3095 4855,2450 5165,2140 5420,2140 5500,2060 R160.2@5500,1837
NetQ41_3: Q41.3 R166.1 R172.1 | length 298.7
  Top Layer w20: R172.1@4030,2600 R166.1@4175,2600 Q41.3@4175,2753.74
NetQ42_1: Q42.1 R161.2 | length 2354
  Top Layer w20: Q42.1@5837.4,2846.26 5837.4,3122.4 5880,3165 6435,3165 6480,3120 6480,2280 6200,2000 R161.2@6200,1837
NetQ42_3: Q42.3 R167.1 R173.1 | length 298.7
  Top Layer w20: R173.1@5655,2600 R167.1@5800,2600 Q42.3@5800,2753.74
NetQ43_1: Q43.1 R162.2 | length 2872.2
  Top Layer w20: R162.2@8800,1837 8800,2075 8850,2125 9285,2125 9720,2560 9720,3105 9650,3175 9125,3175 9087.4,3137.4 Q43.1@9087.4,2846.26
NetQ43_3: Q43.3 R168.1 R174.1 | length 298.7
  Top Layer w20: R174.1@8905,2600 R168.1@9050,2600 Q43.3@9050,2753.74
NetQ44_1: Q44.1 R163.2 | length 3765.7
  Top Layer w20: R163.2@9500,1837 9500,1900 9895,2295 11215,2295 11360,2440 11360,3080 11265,3175 10775,3175 10712.4,3112.4 Q44.1@10712.4,2846.26
NetQ44_3: Q44.3 R169.1 R175.1 | length 298.7
  Top Layer w20: R175.1@10530,2600 R169.1@10675,2600 Q44.3@10675,2753.74
NetQ45_1: Q45.1 R164.2 | length 4929.7
  Top Layer w20: R164.2@10200,1837 10200,1900 10350,2050 11870,2050 12010,2190 12950,2190 13030,2270 13030,3105 12950,3185 12364.8,3185 12337.4,3157.6 Q45.1@12337.4,2846.26
NetQ45_3: Q45.3 R170.1 R176.1 | length 298.7
  Top Layer w20: R176.1@12155,2600 R170.1@12300,2600 Q45.3@12300,2753.74
NetQ46_1: Q46.1 R177.2 | length 3957.1
  Top Layer w20: Q46.1@2332.6,2853.74 2332.6,2877.4 2355.2,2900 2455,2900 2500,2945 2500,3160 2545,3205 3195,3205 3270,3130 3270,2330 3470,2130 4725,2130 4900,1955 R177.2@4900,1837
NetQ46_3: Q46.3 R183.1 R189.1 | length 327.4
  Top Layer w20: R183.1@2205,2855 2205,2895 2250,2940 R189.1@2250,3045 ; 2251.26,2946.26 Q46.3@2370,2946.26
NetQ47_1: Q47.1 R178.2 | length 3035
  Top Layer w20: Q47.1@3957.6,2853.74 3957.6,2872.4 3985.2,2900 4080,2900 4100,2920 4100,3155 4150,3205 4795,3205 4895,3105 4895,2465 5185,2175 5530,2175 5600,2105 R178.2@5600,1837
NetQ47_3: Q47.3 R184.1 R190.1 | length 327.4
  Top Layer w20: R184.1@3830,2855 3830,2900 3875,2945 R190.1@3875,3045 ; 3876.26,2946.26 Q47.3@3995,2946.26
NetQ48_1: Q48.1 R179.2 | length 2646.8
  Top Layer w20: Q48.1@5582.6,2853.74 5582.6,2887.6 5595,2900 5665,2900 5700,2935 5700,3150 5755,3205 6450,3205 6520,3135 6520,2220 6300,2000 R179.2@6300,1837
NetQ48_3: Q48.3 R185.1 R191.1 | length 327.4
  Top Layer w20: R185.1@5455,2855 5455,2895 5500,2940 R191.1@5500,3045 ; 5501.26,2946.26 Q48.3@5620,2946.26
NetQ49_1: Q49.1 R180.2 | length 3112.9
  Top Layer w20: Q49.1@8832.6,2853.74 8883.86,2905 8935,2905 8970,2940 8970,3165 9025,3220 9680,3220 9755,3145 9755,2540 9305,2090 8940,2090 8900,2050 R180.2@8900,1837
NetQ49_3: Q49.3 R186.1 R192.1 | length 324.9
  Top Layer w20: R186.1@8705,2855 8705,2890 8750,2935 R192.1@8750,3045 ; 8753.74,2946.26 Q49.3@8870,2946.26
NetQ50_1: Q50.1 R181.2 | length 4039.9
  Top Layer w20: R181.2@9600,1837 9600,1900 9960,2260 11240,2260 11400,2420 11400,3105 11285,3220 10645,3220 10600,3175 10600,2945 10555,2900 10503.86,2900 Q50.1@10457.6,2853.74
NetQ50_3: Q50.3 R187.1 R193.1 | length 319.9
  Top Layer w20: R187.1@10330,2855 10330,2895 10375,2940 R193.1@10375,3045 ; 10383.74,2946.26 Q50.3@10495,2946.26
NetQ51_1: Q51.1 R182.2 | length 5177.9
  Top Layer w20: R182.2@10300,1837 10300,1900 10415,2015 11880,2015 12025,2160 12975,2160 13070,2255 13070,3115 12965,3220 12240,3220 12205,3185 12205,2920 12185,2900 12128.86,2900 Q51.1@12082.6,2853.74
NetQ51_3: Q51.3 R188.1 R194.1 | length 325.5
  Top Layer w20: R188.1@11955,2855 11955,2910 12000,2955 R194.1@12000,3045 ; 12003.1,2946.26 Q51.3@12120,2946.26
NetQ52_1: Q52.1 R195.2 | length 4050.9
  Top Layer w20: Q52.1@2522.6,3953.74 2522.6,3927.4 2550,3900 2775,3900 3310,3365 3310,2345 3490,2165 4815,2165 5000,1980 R195.2@5000,1837
NetQ52_3: Q52.3 R201.1 R207.1 | length 367
  Top Layer w20: R201.1@2350,3955 2350,4000 2400,4050 R207.1@2400,4145 ; 2403.74,4046.26 Q52.3@2560,4046.26
NetQ53_1: Q53.1 R196.2 | length 3128.7
  Top Layer w20: Q53.1@4147.6,3953.74 4147.6,3927.6 4175.2,3900 4400,3900 4935,3365 4935,2475 5200,2210 5605,2210 5700,2115 R196.2@5700,1837
NetQ53_3: Q53.3 R202.1 R208.1 | length 367
  Top Layer w20: R202.1@3975,3955 3975,4000 4025,4050 R208.1@4025,4145 ; 4028.74,4046.26 Q53.3@4185,4046.26
NetQ54_1: Q54.1 R197.2 | length 2638
  Top Layer w20: Q54.1@5772.6,3953.74 5772.6,3927.4 5800,3900 6020,3900 6560,3360 6560,2160 6400,2000 R197.2@6400,1837
NetQ54_3: Q54.3 R203.1 R209.1 | length 377
  Top Layer w20: R203.1@5600,3955 5600,4010 5650,4060 R209.1@5650,4145 ; 5643.74,4046.26 Q54.3@5810,4046.26
NetQ55_1: Q55.1 R198.2 | length 3037.6
  Top Layer w20: R198.2@9000,1837 9000,2005 9045,2050 9320,2050 9795,2525 9795,3370 9265,3900 9076.34,3900 Q55.1@9022.6,3953.74
NetQ55_3: Q55.3 R204.1 R210.1 | length 369.5
  Top Layer w20: R204.1@8850,3955 8850,3995 8900,4045 R210.1@8900,4145 ; 8901.26,4046.26 Q55.3@9060,4046.26
NetQ56_1: Q56.1 R199.2 | length 3996.7
  Top Layer w20: R199.2@9700,1837 9700,1900 10025,2225 11260,2225 11440,2405 11440,3345 10885,3900 10701.34,3900 Q56.1@10647.6,3953.74
NetQ56_3: Q56.3 R205.1 R211.1 | length 367
  Top Layer w20: R205.1@10475,3955 10475,4000 10525,4050 R211.1@10525,4145 ; 10528.74,4046.26 Q56.3@10685,4046.26
NetQ57_1: Q57.1 R200.2 | length 5112.1
  Top Layer w20: R200.2@10400,1837 10400,1900 10480,1980 11895,1980 12040,2125 12995,2125 13110,2240 13110,3315 12525,3900 12290,3900 12272.6,3917.4 Q57.1@12272.6,3953.74
NetQ57_3: Q57.3 R206.1 R212.1 | length 369.5
  Top Layer w20: R206.1@12100,3955 12100,3995 12150,4045 R212.1@12150,4145 ; 12151.26,4046.26 Q57.3@12310,4046.26
NetQ58_1: Q58.1 R213.2 | length 3868
  Top Layer w20: Q58.1@2777.4,3946.26 3350,3373.66 3350,2360 3510,2200 4870,2200 5100,1970 R213.2@5100,1837
NetQ58_3: Q58.3 R219.1 R225.1 | length 293.7
  Top Layer w20: R219.1@2605,3700 R225.1@2745,3700 ; R225.1@2740,3700 Q58.3@2740,3853.74
NetQ59_1: Q59.1 R214.2 | length 2969.3
  Top Layer w20: Q59.1@4402.4,3946.26 4975,3373.66 4975,2490 5220,2245 5700,2245 5800,2145 R214.2@5800,1837
NetQ59_3: Q59.3 R220.1 R226.1 | length 288.7
  Top Layer w20: R220.1@4230,3700 R226.1@4370,3700 ; R226.1@4365,3705 Q59.3@4365,3853.74
NetQ60_1: Q60.1 R215.2 | length 2387.9
  Top Layer w20: Q60.1@6027.4,3946.26 6600,3373.66 6600,2100 6500,2000 R215.2@6500,1837
NetQ60_3: Q60.3 R221.1 R227.1 | length 288.7
  Top Layer w20: R221.1@5855,3700 R227.1@5995,3700 ; R227.1@5990,3705 Q60.3@5990,3853.74
NetQ61_1: Q61.1 R216.2 | length 2761.8
  Top Layer w20: R216.2@9100,1837 9100,1975 9135,2010 9335,2010 9835,2510 9835,3388.66 Q61.1@9277.4,3946.26
NetQ61_3: Q61.3 R222.1 R228.1 | length 293.7
  Top Layer w20: R222.1@9105,3700 R228.1@9245,3700 ; R228.1@9240,3700 Q61.3@9240,3853.74
NetQ62_1: Q62.1 R217.2 | length 3737.3
  Top Layer w20: R217.2@9800,1837 9800,1900 10090,2190 11280,2190 11475,2385 11475,3373.66 Q62.1@10902.4,3946.26
NetQ62_3: Q62.3 R223.1 R229.1 | length 293.7
  Top Layer w20: R223.1@10730,3700 R229.1@10870,3700 ; R229.1@10865,3700 Q62.3@10865,3853.74
NetQ63_1: Q63.1 R218.2 | length 4825.6
  Top Layer w20: R218.2@10500,1837 10500,1900 10545,1945 11910,1945 12055,2090 13020,2090 13145,2215 13145,3328.66 Q63.1@12527.4,3946.26
NetQ63_3: Q63.3 R224.1 R230.1 | length 288.7
  Top Layer w20: R224.1@12355,3700 R230.1@12495,3700 ; R230.1@12490,3705 Q63.3@12490,3853.74
NetR2_2: R2.2 U2.1 U6.1 U9.1 U13.1 | length 1919.5
  Top Layer w10: R2.2@4398,5365 4398,5325 4419.88,5303.12 U2.1@4419.88,5275 v1(4500,5275) ; U6.1@4919.88,5275 v1(5000,5275) ; U9.1@5419.88,5275 v1(5500,5275) ; U13.1@5919.88,5275 v1(6000,5275)
  Bottom Layer w10: v1(4500,5275) v1(6000,5275)
NetR17_2: R17.2 U7.7 | length 903.7
  Top Layer w20: R17.2@10137,6000 10200,6000 v1(10270,5930) ; v1(10150,5305) U7.7@10150,5372
  Bottom Layer w20: v1(10150,5305) 10270,5425 v1(10270,5930)
NetR18_2: R18.2 R29.1 U7.6 | length 200
  Top Layer w10: R18.2@10087,5250 R29.1@10178,5250 ; R18.2@10100,5263 U7.6@10100,5372
NetR32_1: R32.1 U3.50 U4.4 | length 5705.2
  Top Layer w10: U3.50@7185.16,5040.16 7185.16,4939.84 7223,4902 v1(7313,4902) R32.1@7313,4850 ; v1(8110,4902) 8110,1055 8220,945 8755,945 8780.32,919.68 U4.4@8780.32,880.71
  Bottom Layer w10: v1(7313,4902) v1(8110,4902)
NetR53_2: R53.2 R59.1 U11.4 | length 215.7
  Top Layer w10: U11.4@7975,494.68 8094.68,494.68 ; R53.2@8100,467 R59.1@8100,563
NetR105_1: R105.1 U19.19 | length 321.8
  Top Layer w20: R105.1@4500,1763 4500,1690 4515,1675 4630,1675 4675,1630 U19.19@4675,1581.1
NetR106_1: R106.1 U20.19 | length 318.8
  Top Layer w20: R106.1@5200,1763 5200,1695 5220,1675 5330,1675 5375,1630 U20.19@5375,1581.1
NetR107_1: R107.1 U21.19 | length 321.8
  Top Layer w20: R107.1@5900,1763 5900,1690 5915,1675 6030,1675 6075,1630 U21.19@6075,1581.1
NetR108_1: R108.1 U22.19 | length 315.9
  Top Layer w20: R108.1@8500,1763 8500,1700 8530,1670 8635,1670 8675,1630 U22.19@8675,1581.1
NetR109_1: R109.1 U23.19 | length 324.7
  Top Layer w20: R109.1@9200,1763 9200,1685 9215,1670 9335,1670 9375,1630 U23.19@9375,1581.1
NetR110_1: R110.1 U24.19 | length 318.8
  Top Layer w20: R110.1@9900,1763 9900,1695 9920,1675 10030,1675 10075,1630 U24.19@10075,1581.1
NetR123_1: R123.1 U19.18 | length 233.7
  Top Layer w20: R123.1@4600,1763 4725,1638 U19.18@4725,1581.1
NetR124_1: R124.1 U20.18 | length 233.7
  Top Layer w20: R124.1@5300,1763 5425,1638 U20.18@5425,1581.1
NetR125_1: R125.1 U21.18 | length 233.7
  Top Layer w20: R125.1@6000,1763 6125,1638 U21.18@6125,1581.1
NetR126_1: R126.1 U22.18 | length 233.7
  Top Layer w20: R126.1@8600,1763 8725,1638 U22.18@8725,1581.1
NetR127_1: R127.1 U23.18 | length 233.7
  Top Layer w20: R127.1@9300,1763 9425,1638 U23.18@9425,1581.1
NetR128_1: R128.1 U24.18 | length 233.7
  Top Layer w20: R128.1@10000,1763 10125,1638 U24.18@10125,1581.1
NetR141_1: R141.1 U19.17 | length 213
  Top Layer w20: R141.1@4700,1763 4700,1725 4775,1650 U19.17@4775,1581.1
NetR142_1: R142.1 U20.17 | length 213
  Top Layer w20: R142.1@5400,1763 5400,1725 5475,1650 U20.17@5475,1581.1
NetR143_1: R143.1 U21.17 | length 213
  Top Layer w20: R143.1@6100,1763 6100,1725 6175,1650 U21.17@6175,1581.1
NetR144_1: R144.1 U22.17 | length 213
  Top Layer w20: R144.1@8700,1763 8700,1725 8775,1650 U22.17@8775,1581.1
NetR145_1: R145.1 U23.17 | length 213
  Top Layer w20: R145.1@9400,1763 9400,1725 9475,1650 U23.17@9475,1581.1
NetR146_1: R146.1 U24.17 | length 213
  Top Layer w20: R146.1@10100,1763 10100,1725 10175,1650 U24.17@10175,1581.1
NetR159_1: R159.1 U19.16 | length 192.3
  Top Layer w20: R159.1@4800,1763 4800,1685 4825,1660 U19.16@4825,1581.1
NetR160_1: R160.1 U20.16 | length 192.3
  Top Layer w20: R160.1@5500,1763 5500,1685 5525,1660 U20.16@5525,1581.1
NetR161_1: R161.1 U21.16 | length 192.3
  Top Layer w20: R161.1@6200,1763 6200,1685 6225,1660 U21.16@6225,1581.1
NetR162_1: R162.1 U22.16 | length 192.3
  Top Layer w20: R162.1@8800,1763 8800,1690 8825,1665 U22.16@8825,1581.1
NetR163_1: R163.1 U23.16 | length 192.3
  Top Layer w20: R163.1@9500,1763 9500,1685 9525,1660 U23.16@9525,1581.1
NetR164_1: R164.1 U24.16 | length 192.3
  Top Layer w20: R164.1@10200,1763 10200,1685 10225,1660 U24.16@10225,1581.1
NetR177_1: R177.1 U19.15 | length 192.3
  Top Layer w20: U19.15@4875,1581.1 4875,1660 4900,1685 R177.1@4900,1763
NetR178_1: R178.1 U20.15 | length 192.3
  Top Layer w20: U20.15@5575,1581.1 5575,1660 5600,1685 R178.1@5600,1763
NetR179_1: R179.1 U21.15 | length 192.3
  Top Layer w20: U21.15@6275,1581.1 6275,1660 6300,1685 R179.1@6300,1763
NetR180_1: R180.1 U22.15 | length 192.3
  Top Layer w20: U22.15@8875,1581.1 8875,1665 8900,1690 R180.1@8900,1763
NetR181_1: R181.1 U23.15 | length 192.3
  Top Layer w20: U23.15@9575,1581.1 9575,1660 9600,1685 R181.1@9600,1763
NetR182_1: R182.1 U24.15 | length 192.3
  Top Layer w20: U24.15@10275,1581.1 10275,1670 10300,1695 R182.1@10300,1763
NetR195_1: R195.1 U19.14 | length 213
  Top Layer w20: U19.14@4925,1581.1 4925,1650 5000,1725 R195.1@5000,1763
NetR196_1: R196.1 U20.14 | length 213
  Top Layer w20: U20.14@5625,1581.1 5625,1650 5700,1725 R196.1@5700,1763
NetR197_1: R197.1 U21.14 | length 213
  Top Layer w20: U21.14@6325,1581.1 6325,1650 6400,1725 R197.1@6400,1763
NetR198_1: R198.1 U22.14 | length 213
  Top Layer w20: U22.14@8925,1581.1 8925,1650 9000,1725 R198.1@9000,1763
NetR199_1: R199.1 U23.14 | length 213
  Top Layer w20: U23.14@9625,1581.1 9625,1650 9700,1725 R199.1@9700,1763
NetR200_1: R200.1 U24.14 | length 213
  Top Layer w20: U24.14@10325,1581.1 10325,1650 10400,1725 R200.1@10400,1763
NetR213_1: R213.1 U19.13 | length 233.7
  Top Layer w20: U19.13@4975,1581.1 4975,1638 R213.1@5100,1763
NetR214_1: R214.1 U20.13 | length 233.7
  Top Layer w20: U20.13@5675,1581.1 5675,1638 R214.1@5800,1763
NetR215_1: R215.1 U21.13 | length 233.7
  Top Layer w20: U21.13@6375,1581.1 6375,1638 R215.1@6500,1763
NetR216_1: R216.1 U22.13 | length 233.7
  Top Layer w20: U22.13@8975,1581.1 8975,1638 R216.1@9100,1763
NetR217_1: R217.1 U23.13 | length 232.8
  Top Layer w20: U23.13@9675,1581.1 9675,1640 R217.1@9798,1763
NetR218_1: R218.1 U24.13 | length 233.7
  Top Layer w20: U24.13@10375,1581.1 10375,1638 R218.1@10500,1763
NetR233_1: R233.1 U3.17 | length 9299
  Top Layer w10: v1(6425,5610) 6425,5215 6375,5165 6375,4895 6545,4725 6545,4515 6455,4425 6455,4325 6495,4285 6640,4285 6670,4255 6670,3880 6600,3810 6600,3565 6670,3495 v1(6670,1520) ; U3.17@7067.05,5559.84 v1(7067.05,5695) ; v1(8500,1455) 8500,1060 8535,1025 8800,1025 8935,890 9125,890 9160,925 9315,925 9535,705 R233.1@10076,705
  Bottom Layer w10: v1(6425,5610) 6425,5665 6455,5695 v1(7067.05,5695) ; v1(6670,1520) 7095,1520 7160,1455 v1(8500,1455)
NetU1_11: U1.11 U25.9 | length 1370.3
  Top Layer w10: U25.9@7575,3005.31 7639.68,3005.31 7655,3020.63 7655,4270 7643.9,4281.1 U1.11@7625,4281.1
NetU3_29: U3.29 U3.30 | length 114.3
  Top Layer w10: U3.30@6935.16,5309.84 6890.16,5309.84 6885,5315 6885,5325 6889.53,5329.53 U3.29@6935.16,5329.53
NetU14_11: U14.11 U25.7 | length 255
  Top Layer w10: U25.7@7525,2794.68 7525,2740 7625,2640 U14.11@7625,2581.1
NetU19_11: U19.11 U25.15 | length 3592.6
  Top Layer w10: U19.11@5075,1581.1 v1(5108.9,1581.1) ; v1(6755,1635) v1(6755,2925) ; v1(7275,2925) U25.15@7275,3005.31
  Bottom Layer w10: v1(5108.9,1581.1) 5162.79,1635 v1(6755,1635) ; v1(6755,2925) v1(7275,2925)
NetU20_11: U20.11 U25.14 | length 2957.3
  Top Layer w10: U20.11@5775,1581.1 v1(5808.9,1581.1) ; v1(6780,1610) v1(6780,2900) ; v1(7325,2900) U25.14@7325,3005.31
  Bottom Layer w10: v1(5808.9,1581.1) 6448.9,1581.1 6477.79,1610 v1(6780,1610) ; v1(6780,2900) v1(7325,2900)
NetU21_11: U21.11 U25.13 | length 2319.2
  Top Layer w10: U21.11@6475,1581.1 v1(6513.9,1581.1) ; v1(6805,1581.1) v1(6805,2870) ; v1(7375,2875) U25.13@7375,3005.31
  Bottom Layer w10: v1(6513.9,1581.1) v1(6805,1581.1) ; v1(6805,2870) v1(7375,2875)
NetU22_11: U22.11 U25.12 | length 3216.4
  Top Layer w10: v1(7425,2890) U25.12@7425,3005.31 ; v1(7735,1510) v1(7735,2890) ; v1(9075,1510) U22.11@9075,1581.1
  Bottom Layer w10: v1(7425,2890) v1(7735,2890) ; v1(7735,1510) v1(9075,1510)
NetU23_11: U23.11 U25.11 | length 3825.9
  Top Layer w10: v1(7475,2915) U25.11@7475,3005.31 ; v1(7760,1555) v1(7760,2915) ; v1(9775,1520) U23.11@9775,1581.1
  Bottom Layer w10: v1(7475,2915) v1(7760,2915) ; v1(7760,1555) 9740,1555 v1(9775,1520)
NetU24_11: U24.11 U25.10 | length 4442
  Top Layer w10: v1(7525,2940) U25.10@7525,3005.31 ; v1(7785,1581.1) v1(7785,2940) ; U24.11@10475,1581.1 v1(10508.9,1581.1)
  Bottom Layer w10: v1(7525,2940) v1(7785,2940) ; v1(7785,1581.1) v1(10508.9,1581.1)
NetU26_3: U26.3 Y2.1 | length 127.7
  Top Layer w10: Y2.1@7350,950 7350,990 7386.02,1026.02 U26.3@7386.02,1062.8
NetU26_5: U26.5 Y2.4 | length 128.9
  Top Layer w10: U26.5@7437.2,1062.8 7437.2,1027.8 7475.98,989.02 Y2.4@7475.98,950
OPT0: JP4.1 R74.1 U3.76 | length 7517.2
  Top Layer w10: JP4.1@5743,745 5743,843 5835,935 v1(5835,1200) ; U3.76@7454.84,5408.27 7991.73,5408.27 8060,5340 v1(8060,1320)
  Top Layer w20: R74.1@5647,745 JP4.1@5743,745
  Bottom Layer w10: v1(5835,1200) 6735,1200 6855,1320 8015,1320 v1(8060,1320)
OPT1: JP3.1 R68.1 U3.77 | length 7859.6
  Top Layer w10: JP3.1@5743,650 5743,598 5761,580 5910,580 5950,620 v1(5950,1175) ; U3.77@7454.84,5427.95 8047.05,5427.95 8085,5390 v1(8085,1295)
  Top Layer w20: R68.1@5647,650 JP3.1@5743,650
  Bottom Layer w10: v1(5950,1175) 6740,1175 6860,1295 8040,1295 v1(8085,1295)
OPT2: JP2.1 R61.1 U3.23 | length 7017.7
  Top Layer w10: JP2.1@5063,750 5063,848 5160,945 v1(5160,1250) ; v1(6565,5500) 6565,5420 6535,5390 6535,4945 6830.62,4649.38 6830.62,1535.62 6690,1395 v1(6690,1250) ; v1(6745,5520) 6785,5520 6857.36,5447.64 U3.23@6935.16,5447.64
  Top Layer w20: R61.1@4967,750 JP2.1@5063,750
  Bottom Layer w10: v1(5160,1250) v1(6690,1250) ; v1(6565,5500) 6585,5520 v1(6745,5520)
OPT3: JP1.1 R60.1 U3.24 | length 7234.3
  Top Layer w10: JP1.1@5063,650 5063,608 5080,591 5209,591 5240,622 v1(5240,1225) ; v1(6590,5470) 6590,5415 6555,5380 6555,4955 6850.62,4659.38 6850.62,1520.62 6715,1385 v1(6715,1225) ; v1(6725,5495) 6780,5495 6847.05,5427.95 U3.24@6935.16,5427.95
  Top Layer w20: R60.1@4967,650 JP1.1@5063,650
  Bottom Layer w10: v1(5240,1225) v1(6715,1225) ; v1(6590,5470) 6615,5495 v1(6725,5495)
PGC: J13.5 U3.19 | length 1789.9
  Top Layer w10: J13.5@6320,6770 6415,6865 6580,6865 6620,6825 6620,6720 6770,6570 6770,5881.88 7027.68,5624.2 U3.19@7027.68,5559.84
PGD: J13.4 U3.20 | length 1412.3
  Top Layer w10: J13.4@6520,6770 6750,6540 6750,5870 7007.99,5612.01 U3.20@7007.99,5559.84
R\S\2\3\2\_\I\N\V\A\L\I\D\: U3.15 U15.10 | length 3047.1
  Top Layer w10: v1(4650,6025) 4663.98,6038.98 U15.10@4663.98,6128.94 ; U3.15@7106.42,5559.84 7106.42,5616.42 7130,5640 v1(7130,5720)
  Bottom Layer w10: v1(4650,6025) 4650,5750 4680,5720 v1(7130,5720)
RTC_CE: U3.10 U26.12 | length 6517.1
  Top Layer w10: U3.10@7204.84,5559.84 7204.84,5659.84 7285,5740 8215,5740 8335,5620 8335,3085 8255,3005 8255,1325 8275,1305 v1(8275,1240) ; v1(7539.57,1240) U26.12@7539.57,1287.2
  Bottom Layer w10: v1(7539.57,1240) v1(8275,1240)